# EAGLE board sms_adapter (EAGLE 7.6.0)
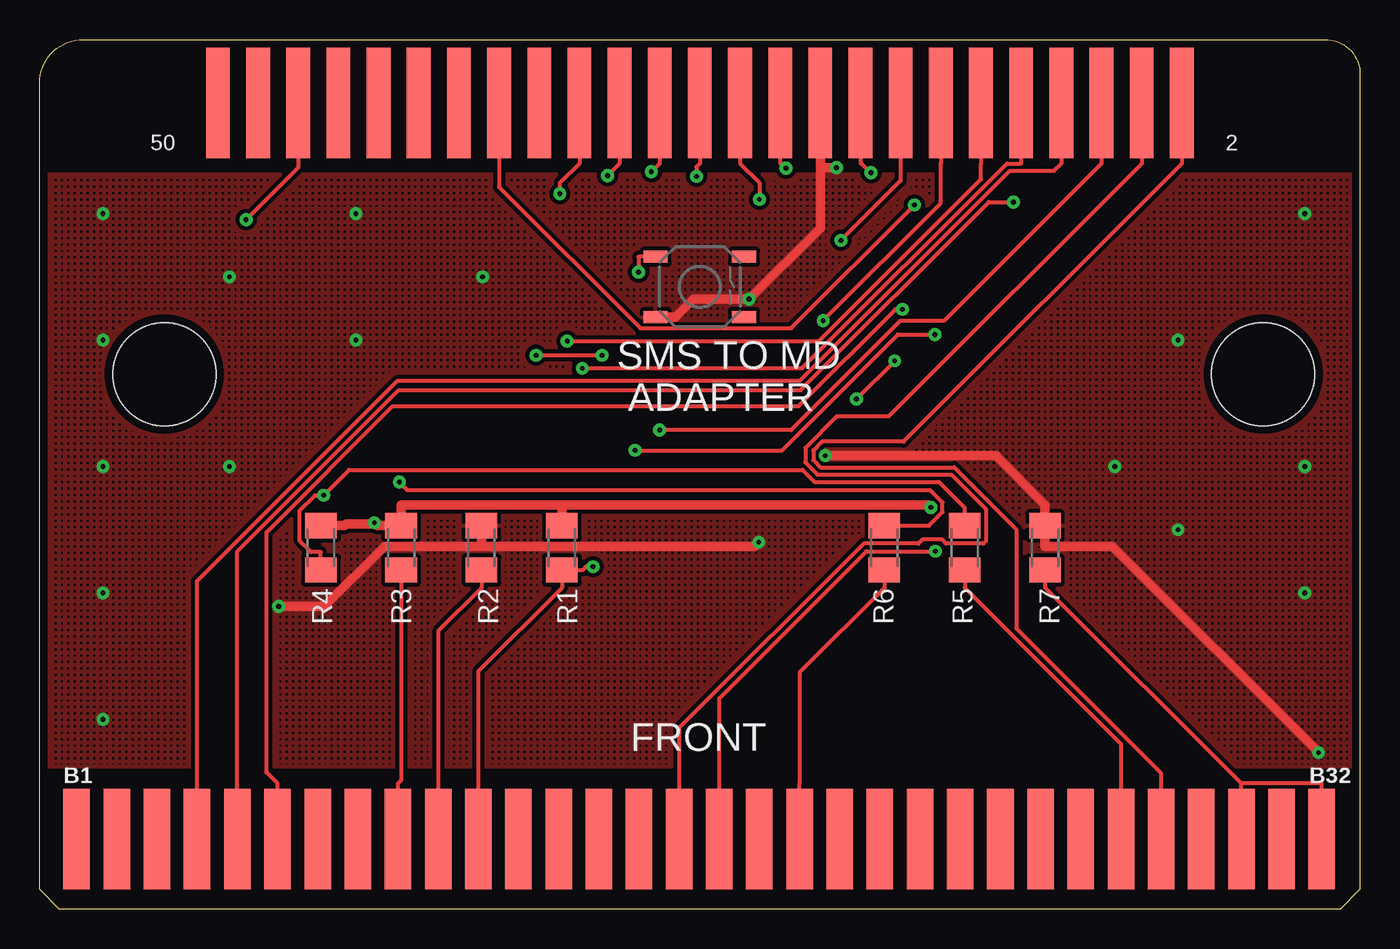
[diagram p0: board, top side]
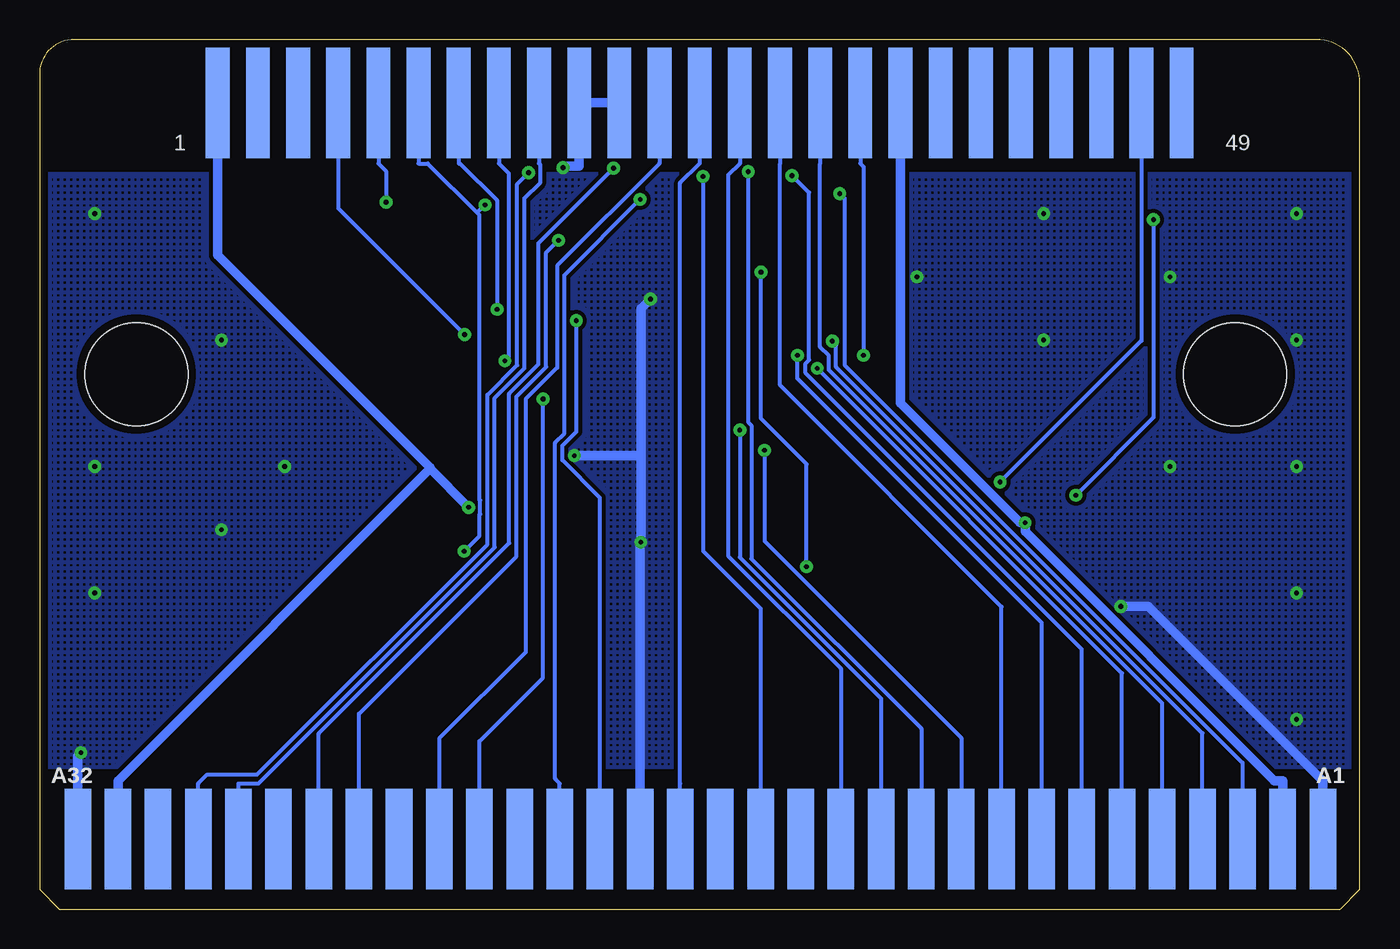
[diagram p1: board, bottom side, seen from below]

Size 83.51 x 55.01 mm. Coordinates in mm from the lower left corner, seen from the top.
Outline: 2.51,55 81.11,55 arc-90 83.51,53 83.51,1.25 82.26,0 1.26,0 0.01,1.25 0.01,52 arc-90 2.51,55
Copper layers (1*16): Top 0.035mm / dielectric 1.5mm / Bottom 0.035mm
Design rules "SparkFun_small": minimum track width 8mil, minimum drill 12mil, track to track 8mil, track to pad 8mil, pad to pad 8mil, via to via 8mil, smd to smd 8mil, copper to edge 20mil, drill to drill 12mil, minimum pad ring 12mil, minimum via ring 10mil, stop-mask expansion 4mil, vias tented up to drill 25mil, thermal gap 10mil
Net classes: 0 default: width 0.254 mm, drill 0.305 mm, clearance 0.203 mm; 1 power: width 0.61 mm, drill 0.406 mm, clearance 0.203 mm; 2 gnd: width 0.61 mm, drill 0.406 mm, clearance 0.203 mm; 3 power usb: width 0.61 mm, drill 0.406 mm, clearance 0.203 mm
Holes 6.5 mm at 7.89,33.84 77.39,33.84
tRestrict: area 0,0 to 83.5,1.5
bRestrict: area 0,0 to 83.5,1.5

## Footprints (pad centres in the part's own frame; a part is rotated, then mirrored left to right if it is on the bottom)
MEGADRIVE-CART-CONNECTOR = smd 1.676 x 6.35 bottom: A1 0.838,3.175; A2 3.378,3.175; A3 5.918,3.175; A4 8.458,3.175; A5 10.998,3.175; A6 13.538,3.175; A7 16.078,3.175; A8 18.618,3.175; A9 21.158,3.175; A10 23.698,3.175; A11 26.238,3.175; A12 28.778,3.175; A13 31.318,3.175; A14 33.858,3.175; A15 36.398,3.175; A16 38.938,3.175; A17 41.478,3.175; A18 44.018,3.175; A19 46.558,3.175; A20 49.098,3.175; A21 51.638,3.175; A22 54.178,3.175; A23 56.718,3.175; A24 59.258,3.175; A25 61.798,3.175; A26 64.338,3.175; A27 66.878,3.175; A28 69.418,3.175; A29 71.958,3.175; A30 74.498,3.175; A31 77.038,3.175; A32 79.578,3.175 | smd 1.676 x 6.35: B1 0.838,3.175; B2 3.378,3.175; B3 5.918,3.175; B4 8.458,3.175; B5 10.998,3.175; B6 13.538,3.175; B7 16.078,3.175; B8 18.618,3.175; B9 21.158,3.175; B10 23.698,3.175; B11 26.238,3.175; B12 28.778,3.175; B13 31.318,3.175; B14 33.858,3.175; B15 36.398,3.175; B16 38.938,3.175; B17 41.478,3.175; B18 44.018,3.175; B19 46.558,3.175; B20 49.098,3.175; B21 51.638,3.175; B22 54.178,3.175; B23 56.718,3.175; B24 59.258,3.175; B25 61.798,3.175; B26 64.338,3.175; B27 66.878,3.175; B28 69.418,3.175; B29 71.958,3.175; B30 74.498,3.175; B31 77.038,3.175; B32 79.578,3.175
M1206 = smd 1.6 x 2: 1 -1.4,0; 2 1.4,0
TACTILE_SWITCH_SMD_5.2MM = smd 1.524 x 0.762: 1 -2.794,1.905; 2 2.794,1.905; 3 -2.794,-1.905; 4 2.794,-1.905
SMS_PINS = smd 1.5 x 7 bottom: P1 30.48,-0.5; P3 27.94,-0.5; P5 25.4,-0.5; P7 22.86,-0.5; P9 20.32,-0.5; P11 17.78,-0.5; P13 15.24,-0.5; P15 12.7,-0.5; P17 10.16,-0.5; P19 7.62,-0.5; P21 5.08,-0.5; P23 2.54,-0.5; P25 0,-0.5; P27 -2.54,-0.5; P29 -5.08,-0.5; P31 -7.62,-0.5; P33 -10.16,-0.5; P35 -12.7,-0.5; P37 -15.24,-0.5; P39 -17.78,-0.5; P41 -20.32,-0.5; P43 -22.86,-0.5; P45 -25.4,-0.5; P47 -27.94,-0.5; P49 -30.48,-0.5 | smd 1.5 x 7: P2 30.48,-0.5; P4 27.94,-0.5; P6 25.4,-0.5; P8 22.86,-0.5; P10 20.32,-0.5; P12 17.78,-0.5; P14 15.24,-0.5; P16 12.7,-0.5; P18 10.16,-0.5; P20 7.62,-0.5; P22 5.08,-0.5; P24 2.54,-0.5; P26 0,-0.5; P28 -2.54,-0.5; P30 -5.08,-0.5; P32 -7.62,-0.5; P34 -10.16,-0.5; P36 -12.7,-0.5; P38 -15.24,-0.5; P40 -17.78,-0.5; P42 -20.32,-0.5; P44 -22.86,-0.5; P46 -25.4,-0.5; P48 -27.94,-0.5; P50 -30.48,-0.5

## Placement (x,y rotation side)
CN3  MEGADRIVE-CART-CONNECTOR-ORDERED  [MEGADRIVE-CART-CONNECTOR]  1.51,1.27 0 top
R1  56K  [M1206]  33.03,22.86 90 top
R2  0  [M1206]  27.95,22.86 270 top
R3  0  [M1206]  22.87,22.86 270 top
R4  0  [M1206]  17.79,22.86 90 top
R5  NP  [M1206]  58.51,22.86 90 top
R6  NP  [M1206]  53.43,22.86 90 top
R7  0  [M1206]  63.59,22.86 270 top
S1  MOMENTARY-SWITCH-SPST-SMD-5.2MM  [TACTILE_SWITCH_SMD_5.2MM]  41.76,39.36 0 top
U$1  SMS-CART_PINS  [SMS_PINS]  41.76,51.5 0 top

## Library data of the parts
CN3 = arcadetv
R1-R7 = adafruit
S1 = !sanni; PROD_ID: SWCH-08247; SF_SKU: COM-08720
U$1 = !sanni_mod4

## Nets
A0: CN3.A17 U$1.P25
A1: CN3.A15 U$1.P26
A2: CN3.A13 U$1.P27
A3: CN3.A11 U$1.P28
A4: CN3.A9 U$1.P29
A5: CN3.A7 U$1.P30
A6: CN3.A5 U$1.P31
A7: CN3.A3 U$1.P32
A8: CN3.B4 U$1.P8
A9: CN3.B5 U$1.P9
A10: CN3.A4 U$1.P12
A11: CN3.A6 U$1.P10
A12: CN3.A8 U$1.P33
A13: CN3.A10 U$1.P7
A14: CN3.A12 U$1.P6
A15: CN3.B17 U$1.P11 U$1.P36
CE: CN3.B6 U$1.P13
CLK: R6.2 U$1.P47
D0: CN3.A20 U$1.P24
D1: CN3.A23 U$1.P23
D2: CN3.A26 U$1.P22
D3: CN3.A29 U$1.P18
D4: CN3.A28 U$1.P17
D5: CN3.A25 U$1.P16
D6: CN3.A22 U$1.P15
D7: CN3.A19 U$1.P14
GND [gnd]: CN3.A1 CN3.A18 CN3.A32 R2.1 R7.1 S1.3 U$1.P19 U$1.P20 U$1.P21
N$1: CN3.B11 R1.1 S1.1
N$2: CN3.B10 R2.2
N$3: CN3.B9 R3.2
N$4: CN3.B19 R6.1
N$5: CN3.B30 CN3.B32 R7.2
N$6: CN3.B27 R5.1
OE: CN3.B16 U$1.P4
RESET: R4.1 R5.2 U$1.P46
VCC [power]: CN3.A2 CN3.A31 R1.2 R3.1 R4.2 U$1.P1 U$1.P35
WR: CN3.B28 U$1.P2

## Tracks (layer width: path | path; a pad name or v marks a point on that pad's centre or on a via)
A0
  Bottom 0.254: CN3.A17 42.99,7.95 42.99,45.95 41.77,47.17 41.76,47.17 U$1.P25
A1  (via drill 0.3 pad 0.81)
  Top 0.254: U$1.P26 41.76,47.17 41.55,46.96 v41.55,46.35
  Bottom 0.254: v41.55,46.35 41.55,22.65 37.91,19.01 CN3.A15
A2
  Bottom 0.254: CN3.A13 32.83,15.21 39.96,22.34 39.96,46.43 39.22,47.17 U$1.P27
A3  (via drill 0.3 pad 0.81)
  Top 0.254: v38.69,46.64 39.22,47.17 U$1.P28
  Bottom 0.254: v38.69,46.64 38.69,30.81 38.49,30.61 38.49,22.16 27.75,11.43 CN3.A11
A4
  Bottom 0.254: CN3.A9 22.67,19.13 36.68,33.14 36.68,47.17 U$1.P29
A5  (via drill 0.3 pad 0.81)
  Top 0.254: v35.92,46.41 36.68,47.17 U$1.P30
  Bottom 0.254: CN3.A7 17.59,16.43 35.06,33.91 35.06,34.52 34.84,34.74 34.84,45.33 v35.92,46.41
A6
  Bottom 0.254: CN3.A5 12.51,13.03 33.59,34.11 33.59,35.01 34.14,35.56 34.14,47.17 U$1.P31
A7  (via drill 0.3 pad 0.81)
  Top 0.254: U$1.P32 34.14,47.17 32.9,45.93 v32.9,45.25
  Bottom 0.254: v32.9,45.25 32.6,44.94 32.6,34.42 7.43,9.26 CN3.A3
A8
  Top 0.254: CN3.B4 9.97,20.75 22.65,33.43 48.09,33.43 61.37,46.71 64.16,46.71 64.62,47.17 U$1.P8
A9  (via drill 0.3 pad 0.81)
  Top 0.254: CN3.B5 12.51,22.63 22.7,32.82 48.13,32.82 60.04,44.73 v61.59,44.73
  Bottom 0.254: U$1.P9 62.08,47.17 61.59,46.68 v61.59,44.73
A10  (via drill 0.3 pad 0.81)
  Top 0.254: v33.37,35.93 49.3,35.93 59.54,46.17 59.54,47.17 U$1.P12
  Bottom 0.254: CN3.A4 9.97,11.13 33.13,34.3 33.13,35.69 v33.37,35.93
A11  (via drill 0.3 pad 0.81)
  Top 0.254: v34.33,34.21 48.23,34.21 61.19,47.17 62.08,47.17 U$1.P10
  Bottom 0.254: CN3.A6 15.05,14.92 34.33,34.2 v34.33,34.21
A12  (via drill 0.3 pad 0.81)
  Top 0.254: v31.4,35.04 v35.59,35.04
  Bottom 0.254: CN3.A8 20.13,18.11 35.59,33.57 v35.59,35.04 | v31.4,35.04 31.4,46.97 31.6,47.17 U$1.P33
A13  (via drill 0.3 pad 0.81)
  Top 0.254: v37.66,29.03 46.96,29.03 54.28,36.35 v56.63,36.35
  Bottom 0.254: v56.63,36.35 64.62,44.34 64.62,47.17 U$1.P7 | v37.66,29.03 37.66,23.28 25.21,10.83 CN3.A10
A14  (via drill 0.3 pad 0.81)
  Top 0.254: v39.22,30.3 47.53,30.3 54.43,37.2 57.19,37.2 67.16,47.17 U$1.P6
  Bottom 0.254: v39.22,30.3 39.22,22.25 30.29,13.32 CN3.A12
A15  (via drill 0.3 pad 0.81)
  Top 0.254: CN3.B17 42.99,13.35 52.28,22.64 v56.66,22.64 | U$1.P36 29.06,45.69 38,36.74 47.53,36.74 v55.34,44.55
  Bottom 0.254: v56.66,22.64 55.69,23.61 55.69,24.58 | 55.69,24.58 | 55.69,24.58 55.69,24.93 55.64,24.98 55.64,25.86 55.69,25.9 55.69,43.9 55.83,44.05 | 55.83,44.05 58.96,47.17 59.54,47.17 U$1.P11 | 55.83,44.05 v55.34,44.55
CE  (via drill 0.3 pad 0.81)
  Top 0.254: v54.58,37.94 54.13,37.94 48,31.82 22.34,31.82 14.36,23.83 14.36,8.64 15.05,7.95 CN3.B6
  Bottom 0.254: v54.58,37.94 54.58,44.84 56.92,47.17 57,47.17 U$1.P13
CLK  (via drill 0.3 pad 0.81)
  Top 0.254: R6.2 56.26,24.26 57.11,25.11 57.11,25.72 56.34,26.5 23.28,26.5 v22.76,27.01
  Bottom 0.254: U$1.P47 13.82,35.95 v22.76,27.01
D0  (via drill 0.3 pad 0.81)
  Top 0.254: v45.52,44.9 45.52,45.95 44.3,47.17 U$1.P24
  Bottom 0.254: v45.52,44.9 50.32,40.1 50.32,30.09 50.9,29.5 50.9,8.24 50.61,7.95 CN3.A20
D1
  Bottom 0.254: U$1.P23 44.3,47.17 50.77,40.7 50.77,34.25 52.77,32.26 52.77,16.25 58.23,10.8 CN3.A23
D2  (via drill 0.3 pad 0.81)
  Top 0.254: U$1.P22 46.84,47.17 46.9,47.17 v47.2,46.87
  Bottom 0.254: CN3.A26 65.85,11.12 53.81,23.16 53.81,32.6 51.95,34.47 51.95,42.12 v47.2,46.87
D3  (via drill 0.3 pad 0.81)
  Top 0.254: U$1.P18 51.92,47.17 51.99,47.17 v52.57,46.58
  Bottom 0.254: v52.57,46.58 53.29,45.86 53.29,34.41 55.18,32.53 55.18,23.08 69.75,8.51 72.91,8.51 73.47,7.95 CN3.A29
D4
  Bottom 0.254: U$1.P17 51.92,47.17 51.83,47.08 51.83,45.97 52.84,44.96 52.84,34.23 54.73,32.34 54.73,22.89 69.66,7.95 70.93,7.95 CN3.A28
D5  (via drill 0.3 pad 0.81)
  Top 0.254: U$1.P16 54.46,46.08 v50.69,42.31
  Bottom 0.254: CN3.A25 63.31,12.36 53.35,22.32 53.35,32.41 51.47,34.3 51.47,41.54 | 51.47,41.54 | 51.47,41.54 v50.69,42.31
D6  (via drill 0.3 pad 0.81)
  Top 0.254: v54.08,34.68 v51.67,32.27
  Bottom 0.254: CN3.A22 55.69,10.62 51.67,14.64 v51.67,32.27 | v54.08,34.68 53.85,34.92 53.85,46.55 54.46,47.17 U$1.P15
D7  (via drill 0.3 pad 0.81)
  Top 0.254: U$1.P14 57,47.17 57,44.67 v49.56,37.23
  Bottom 0.254: CN3.A19 48.07,26.02 50.45,28.39 50.45,29.32 49.56,30.2 v49.56,37.23
GND  (via drill 0.3 pad 0.81)
  Top 0.61: v49.69,28.68 60.47,28.68 63.59,25.57 R7.1 63.59,22.95 67.85,22.95 v80.89,9.9 | 49.38,46.9 49.38,43.09 v44.87,38.59 41.37,38.59 40.24,37.45 S1.3 | 27.95,22.95 21.81,22.95 18.01,19.15 v15.13,19.15 | 49.38,46.9 49.38,47.69 U$1.P20 | 49.38,46.9 v50.41,46.9 | v45.48,23.21 45.23,22.95 27.95,22.95 | R2.1 27.95,22.95
  Bottom 0.61: 45.48,28.68 v45.48,23.21 45.53,23.16 45.53,8.13 CN3.A18 | v44.87,38.59 45.48,37.98 45.48,28.68 | 45.48,28.68 v49.69,28.68 | v15.13,19.15 13.37,19.15 2.35,8.13 CN3.A1 | v50.41,46.9 50.31,46.99 49.38,46.99 U$1.P20 U$1.P21 | CN3.A32 81.09,9.71 v80.89,9.9
  other vias: 4.01,44 4.01,36 4.01,28 4.01,20 4.01,12 12.01,28 12.01,40 80.01,44 72.01,36 68.01,28 72.01,24 80.01,28 80.01,20 20.01,44 20.01,36 28.01,40
  pour Bottom (isolate 0.254, hatched): 0.01,46.5 83.51,46.5 83.51,9 0.01,9
  pour Top (isolate 0.254, hatched): 0.01,46.5 83.51,46.5 83.51,9 0.01,9
N$1  (via drill 0.3 pad 0.81)
  Top 0.254: v37.88,40.3 37.88,41.27 S1.1 | v35,21.66 34.57,21.66 34.36,21.46 R1.1 33.03,20.33 27.75,15.05 CN3.B11
  Bottom 0.254: v35,21.66 35,28.15 37.88,31.03 v37.88,40.3
N$2
  Top 0.254: R2.2 27.95,20.33 25.21,17.59 CN3.B10
N$3
  Top 0.254: CN3.B9 22.67,7.95 22.87,8.15 R3.2
N$4
  Top 0.254: CN3.B19 48.07,7.95 48.07,14.97 53.43,20.33 R6.1
N$5
  Top 0.254: R7.2 63.59,20.33 63.63,20.33 76.01,7.95 | CN3.B32 81.09,7.95 76.01,7.95 | CN3.B30 76.01,7.95
N$6
  Top 0.254: CN3.B27 68.39,10.45 58.51,20.33 R5.1
OE
  Top 0.254: CN3.B16 40.45,11.45 52.13,23.13 55.6,23.13 55.85,23.38 57.09,23.38 57.34,23.13 59.71,23.13 59.84,23.27 59.84,25.31 57.66,27.49 49.2,27.49 48.43,28.26 48.43,29.18 50.41,31.16 53.7,31.16 69.7,47.17 U$1.P4
RESET  (via drill 0.3 pad 0.81)
  Top 0.254: U$1.P46 16.36,46.91 v13.06,43.61 | R5.2 58.51,25.39 56.87,27.03 49.01,27.03 48.26,27.78 19.58,27.78 v17.98,26.18 17.42,26.18 16.46,25.22 16.46,23.3 17.17,22.59 17.79,22.59 R4.1
  Bottom 0.254: v13.06,43.61 13.06,31.1 v17.98,26.18
VCC  (via drill 0.3 pad 0.81)
  Top 0.61: 33.03,25.57 56.23,25.57 v56.38,25.42 | 33.03,25.57 22.87,25.57 R3.1 21.36,24.26 21.27,24.35 21.18,24.35 | 21.18,24.35 19.39,24.35 19.3,24.26 R4.2 | v21.18,24.45 21.18,24.35 | R1.2 33.03,25.57
  Bottom 0.61: 58.82,27.86 | 58.82,27.86 58.82,27.95 72.24,41.37 U$1.P1 | 58.82,27.86 78.55,8.13 CN3.A31 | 58.82,27.86 v56.38,25.42 | CN3.A2 4.89,8.13 5.4,8.13 21.18,23.9 v21.18,24.45 21.5,24.45 29.06,32.01 29.06,46.99 U$1.P35
WR
  Top 0.254: CN3.B28 70.93,8.62 61.78,17.77 61.78,24.02 57.85,27.95 49.39,27.95 48.94,28.4 48.94,29.01 49.49,29.57 54.64,29.57 72.24,47.17 U$1.P2

## Text on the board
tNames: 50 | 2 | SMS TO MD / ADAPTER | FRONT
bNames: 49 | 1